# EAGLE board hidnseek_GPIO_v3.28 (EAGLE 7.6.0)
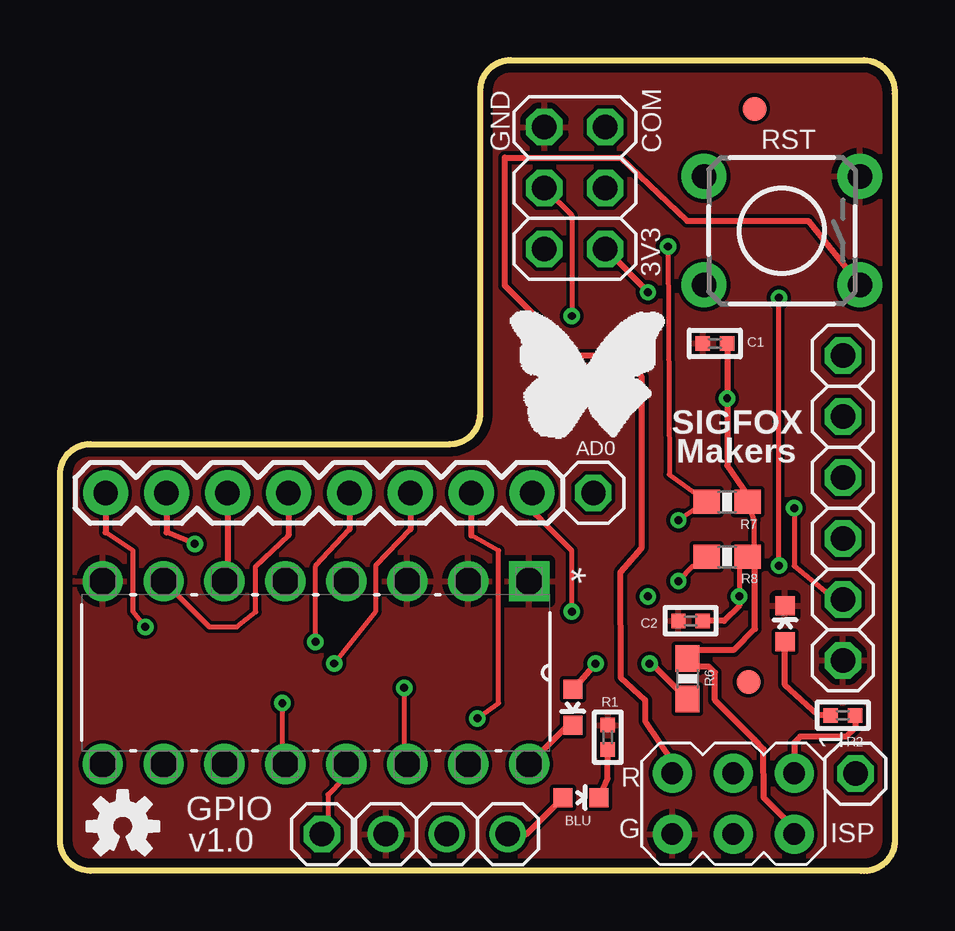
[diagram p0: board, top side]
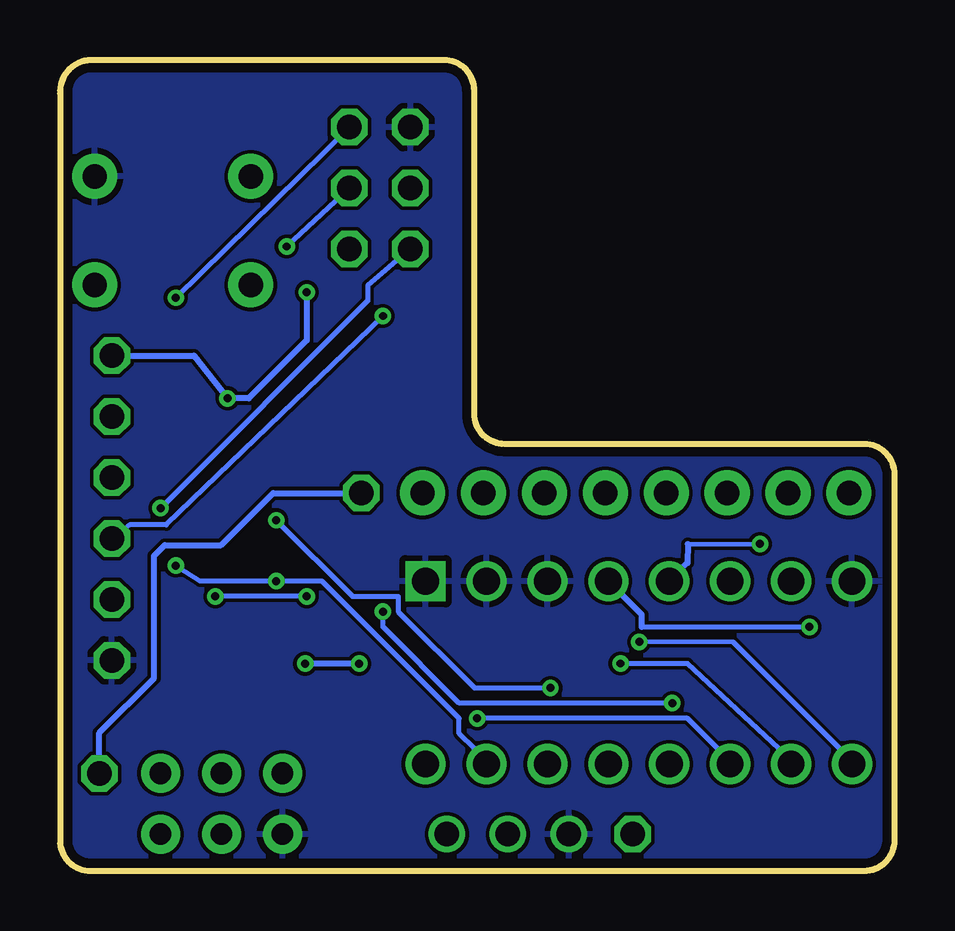
[diagram p1: board, bottom side, seen from below]

Size 34.8 x 33.79 mm. Coordinates in mm from the lower left corner, seen from the top.
Outline: 34.8,32.39 34.8,1.15 arc-90 33.4,0.01 1.27,0.01 arc-90 0,1.28 0,16.52 arc-90 1.27,17.79 16.26,17.79 arc90 17.53,19.06 17.53,32.52 arc-90 18.8,33.79 33.53,33.79 arc-90 34.8,32.39
Copper layers (1*16): Top 0.0356mm / dielectric 1.5011mm / Bottom 0.0356mm
Design rules "oshpark-2layer": minimum track width 6mil, minimum drill 13mil, track to track 6mil, track to pad 6mil, pad to pad 6mil, via to via 6mil, smd to smd 6mil, copper to edge 15mil, drill to drill 6mil, minimum pad ring 7mil, minimum via ring 7mil, stop-mask expansion 2.5mil, vias tented up to drill 0mil, thermal gap 10mil
Net classes: 0 default: width 0.203 mm; 1 power: width 0.203 mm, drill 0.305 mm, clearance 0.152 mm

## Footprints (pad centres in the part's own frame; a part is rotated, then mirrored left to right if it is on the bottom)
1X01 = drill 1.016 octagon: 1 0,0
1X03 = drill 1.016: 1 -2.54,0; 2 0,0; 3 2.54,0
LED-0603 = smd 0.8 x 0.8: A 0,-0.75; C 0,0.75
_0402 = smd 0.6 x 0.6: 1 -0.508,0; 2 0.508,0
HEADER_02X03_PTH = drill 1.016 octagon: 1 0,-2.54; 2 0,0; 3 2.54,-2.54; 4 2.54,0; 5 5.08,-2.54; 6 5.08,0
AVRISP = drill 0.9 pad 1.626: 1 -1.27,2.54; 2 1.27,2.54; 3 -1.27,0; 4 1.27,0; 5 -1.27,-2.54; 6 1.27,-2.54
1X08_ROUND = drill 1.016 pad 1.88: 1 0,0; 2 2.54,0; 3 5.08,0; 4 7.62,0; 5 10.16,0; 6 12.7,0; 7 15.24,0; 8 17.78,0
FIDUCIAL-1X2.5 = smd 1 x 1: 1 0,0
0603-RES = smd 1.1 x 1: 1 -0.85,0; 2 0.85,0
TACTILE-PTH = drill 1.016 pad 1.88: 1 -3.251,2.261; 2 3.251,2.261; 3 -3.251,-2.261; 4 3.251,-2.261
DIP254P762X420-16 = drill 1.118 square: 1 -7.62,17.78 | drill 1.118: 2 -7.62,15.24; 3 -7.62,12.7; 4 -7.62,10.16; 5 -7.62,7.62; 6 -7.62,5.08; 7 -7.62,2.54; 8 -7.62,0; 9 0,0; 10 0,2.54; 11 0,5.08; 12 0,7.62; 13 0,10.16; 14 0,12.7; 15 0,15.24; 16 0,17.78
1X06 = drill 1.016 octagon: 1 -6.35,0; 2 -3.81,0; 3 -1.27,0; 4 1.27,0; 5 3.81,0; 6 6.35,0

## Placement (x,y rotation side)
AD0  [1X01]  22.24,15.75 0 top
AUX  [1X03]  16.13,1.53 180 top
BLU  Blue  [LED-0603]  21.72,3.05 270 top
C1  100nF  [_0402]  27.3,21.98 0 top
C2  0.1uF  [_0402]  26.29,10.42 180 top
COM  [HEADER_02X03_PTH]  22.73,30.99 270 top
GREEN  GRN  [LED-0603]  21.38,6.81 180 top
ISP  AVRISP-6  [AVRISP]  28.07,2.8 270 top
J1  [1X08_ROUND]  1.9,15.75 0 top
JP1  FIDUCIAL1X2.5  [FIDUCIAL-1X2.5]  28.7,7.88 0 top
JP2  FIDUCIAL1X2.5  [FIDUCIAL-1X2.5]  28.96,31.76 0 top
JP3  [1X01]  33.16,4.05 0 top
JP9  [1X01]  10.92,1.53 0 top
R1  100  [_0402]  22.84,5.57 90 top
R2  100  [_0402]  32.64,6.48 180 top
R6  470  [0603-RES]  26.16,8.01 270 top
R7  2.2k  [0603-RES]  27.81,15.37 180 top
R8  2.2k  [0603-RES]  27.81,13.09 180 top
RED  RED  [LED-0603]  30.23,10.29 0 top
RST  RST  [TACTILE-PTH]  30.1,26.68 180 top
U2  PCF8574PN  [DIP254P762X420-16]  1.78,4.45 270 top
U$3  OSHW-LOGOS  [OSHW-LOGO-S]  2.62,1.86 0 top
UART1  [1X06]  32.64,15.12 90 top

## Library data of the parts
AD0 JP3 JP9 = pinhead
AUX ISP UART1 = adafruit
BLU GREEN RED = SparkFun; MOUSER#: 604-APT1608SURCK
C1 C2 = microbuilder; MOUSER#: 81-GRM155R71C104KA88
COM = PP_Connectors
J1 = SparkFun-Connectors; PROD_ID: CONN-08437
JP1 JP2 = hidnSeek
R1 R2 = microbuilder; MOUSER#: 660-RK73B1ETTP101J
R6-R8 = SparkFun-Resistors; PROD_ID: RES-07869
RST = SparkFun-Retired
U2 = NXP_By_element14_Batch_1; MPN: PCF8574PN; OC_FARNELL: -; OC_NEWARK: 11N8515; PACKAGE: DIP-16; SUPPLIER: NXP
U$3 = Arduino-Pro-Mini-v14Arduino-Pro-Mini

## Nets
3.3V: C1.2 C2.1 COM.6 ISP.2 R6.1 R7.1 R8.1 UART1.6
GND [power]: AUX.3 C1.1 C2.2 COM.1 ISP.6 R1.2 RED.C RST.3 U2.1 U2.2 U2.3 U2.8 UART1.1
N$1: BLU.C R1.1
N$2: AUX.1 BLU.A
N$3: R2.2 RED.A
N$4: ISP.1 R2.1
N$5: ISP.5 RST.1
N$6: COM.3 UART1.3
N$7: GREEN.C U2.16
N$8: GREEN.A R6.2
N$9: AD0.1 JP3.1
N$30: COM.5 UART1.2
N$32: COM.4 R7.2 U2.14
N$33: COM.2 R8.2 U2.15
N$34: J1.1 U2.4
N$35: J1.2 U2.5
N$36: J1.3 U2.6
N$37: J1.4 U2.7
N$38: J1.5 U2.9
N$39: J1.6 U2.10
N$40: J1.7 U2.11
N$41: J1.8 U2.12
N$45: JP9.1 U2.13

## Tracks (layer width: path | path; a pad name or v marks a point on that pad's centre or on a via)
3.3V  (via drill 0.33, 0.33 pad 0.25)
  Top 0.203: 28.96,15.25 R7.1 28.96,14.61 28.96,13.34 R8.1 28.32,12.71 v28.32,11.44
  Top 0.254: v24.51,24.11 24.51,24.14 COM.6 | 28.96,15.25 28.7,15.63 27.81,16.9 v27.81,19.69 C1.2 | ISP.2 30.61,1.78 29.34,3.05 29.32,5.07 28.96,5.47 27.3,7.12 27.3,8.26 27.05,8.52 26.5,8.52 R6.1 26.5,9.19 28.09,9.19 28.97,10.08 28.97,12.78 R8.1 | v28.32,11.44 28.32,11.06 27.68,10.41 C2.1
  Bottom 0.203: v24.51,11.44 v28.32,11.44
  Bottom 0.254: v24.51,24.11 24.51,22.1 26.92,19.69 v27.81,19.69 29.21,21.47 UART1.6
GND
  pour Top: -1.52,20.33 -1.52,-0.76 36.07,-0.76 36.07,37.34 16,37.34 16,20.33
  pour Bottom: -0.77,-0.25 35.31,-0.25 35.31,36.58 16.76,36.58 16.76,19.31 -0.76,19.31
N$1
  Top 0.254: BLU.C 22.83,3.85 R1.1
N$2
  Top 0.254: AUX.1 19.44,1.53 BLU.A
N$3
  Top 0.254: R2.2 31.62,6.48 30.23,7.75 RED.A
N$4
  Top 0.254: R2.1 33.15,5.98 32.77,5.59 30.86,5.59 30.61,5.34 ISP.1
N$5
  Top 0.254: ISP.5 25.53,4.58 24.4,6.24 24.4,7.12 23.38,8.06 23.37,12.45 24.26,13.47 24.26,20.58 23.24,21.47 21.46,21.47 18.54,24.39 18.54,29.72 23.37,29.72 26.14,27.09 31.2,27.09 RST.1
N$6  (via drill 0.33)
  Top 0.203: v21.34,23.12 21.34,27.31 COM.3
  Bottom 0.203: UART1.3 31.89,14.42 30.36,14.42 v21.34,23.12
N$7
  Top 0.254: GREEN.C 21.07,5.96 U2.16
N$8  (via drill 0.33)
  Top 0.254: GREEN.A 21.69,7.91 v22.33,8.64 | v24.57,8.64 24.59,8.62 24.7,8.62 R6.2
  Bottom 0.254: v22.33,8.64 v24.57,8.64
N$9
  Bottom 0.254: JP3.1 33.16,5.75 30.88,8.03 30.88,13.12 30.43,13.58 28.08,13.58 25.91,15.74 22.25,15.74 AD0.1
N$30  (via drill 0.33)
  Top 0.203: v30.61,15.12 30.61,12.71 32,11.56 32.39,11.31 UART1.2
  Bottom 0.203: v30.61,15.12 21.97,23.76 21.97,24.39 COM.5
N$32  (via drill 0.33)
  Top 0.203: v25.35,26.02 25.4,16.52 26.8,15.5 R7.2 26.92,15.37 v25.78,14.61 | v14.35,7.63 14.35,4.45 U2.14
  Bottom 0.203: v25.35,26.02 v25.34,26.01 COM.4 | v14.35,7.63 17.53,7.63 20.7,10.8 20.7,11.44 22.61,11.44 v25.78,14.61
N$33  (via drill 0.33)
  Top 0.203: v25.78,12.07 26.42,12.71 R8.2 | v29.97,12.72 v29.97,23.88
  Bottom 0.203: U2.15 16.89,4.45 16.89,5.09 17.53,5.09 18.16,5.72 18.16,6.36 23.88,12.07 v25.78,12.07 28.96,12.07 v29.97,12.72 | v29.97,23.88 COM.2
N$34  (via drill 0.33)
  Top 0.203: 1.9,14.1 3.05,13.34 3.05,10.8 v3.56,10.17
  Top 0.254: J1.1 1.9,14.1
  Bottom 0.203: 10.54,10.17 v3.56,10.17
  Bottom 0.254: 10.54,10.17 10.54,10.67 U2.4
N$35  (via drill 0.33)
  Top 0.203: v5.62,13.62 4.45,14.1
  Top 0.254: J1.2 4.45,14.1
  Bottom 0.203: 8.63,13.61 v5.62,13.62
  Bottom 0.254: 8.63,13.61 8.64,12.83 U2.5
N$36
  Top 0.254: J1.3 6.98,12.2 U2.6
N$37
  Top 0.203: 9.53,13.98 8.16,12.7 8.16,10.79 7.37,10.17 6.22,10.17 U2.7
  Top 0.254: J1.4 9.53,13.98
N$38  (via drill 0.33)
  Top 0.203: 12.07,14.23 10.66,12.71 v10.65,9.54
  Top 0.254: J1.5 12.07,14.23
  Bottom 0.203: v10.65,9.54 6.73,9.53 2.29,5.09
  Bottom 0.254: U2.9 1.78,4.58 2.29,5.09
N$39  (via drill 0.33)
  Top 0.203: 14.61,14.23 13.18,12.73 13.18,10.82 v11.43,8.64
  Top 0.254: J1.6 14.61,14.23
  Bottom 0.203: v11.43,8.64 8.64,8.64 4.83,5.09
  Bottom 0.254: U2.10 4.32,4.58 4.83,5.09
N$40  (via drill 0.33)
  Top 0.203: 17.14,13.98 18.29,13.34 18.29,6.99 v17.4,6.36
  Top 0.254: J1.7 17.14,13.98
  Bottom 0.203: v17.4,6.36 8.64,6.36 7.37,5.09 7.35,5.06 U2.11
N$41  (via drill 0.33)
  Top 0.203: 20.07,14.61 21.34,13.34 v21.34,10.8 | v9.27,6.99 9.27,4.45 U2.12
  Top 0.254: J1.8 19.68,14.99 20.07,14.61
  Bottom 0.203: v21.34,10.8 21.34,10.17 18.16,6.99 v9.27,6.99
N$45
  Top 0.203: JP9.1 11.18,1.91 11.18,3.18 11.81,3.82 11.81,4.45 U2.13

## Text on the board
tPlace: SIGFOX | Makers | GPIO | v1.0
tNames: GND | 3V3 | R | G